# Altium PCB OK335xD V2.4 20160121.PcbDoc (part 4 of 4)
Units mm, origin at the board's own origin, x right, y up, seen from the top; angles counter-clockwise.
Board outline 190 x 130 mm, 4 copper layers (Top Layer, GND, POWER, Bottom Layer); 326 components, 332 nets, 1399 pads, 799 vias.
Unrouted connection lines stored in the file: 413.
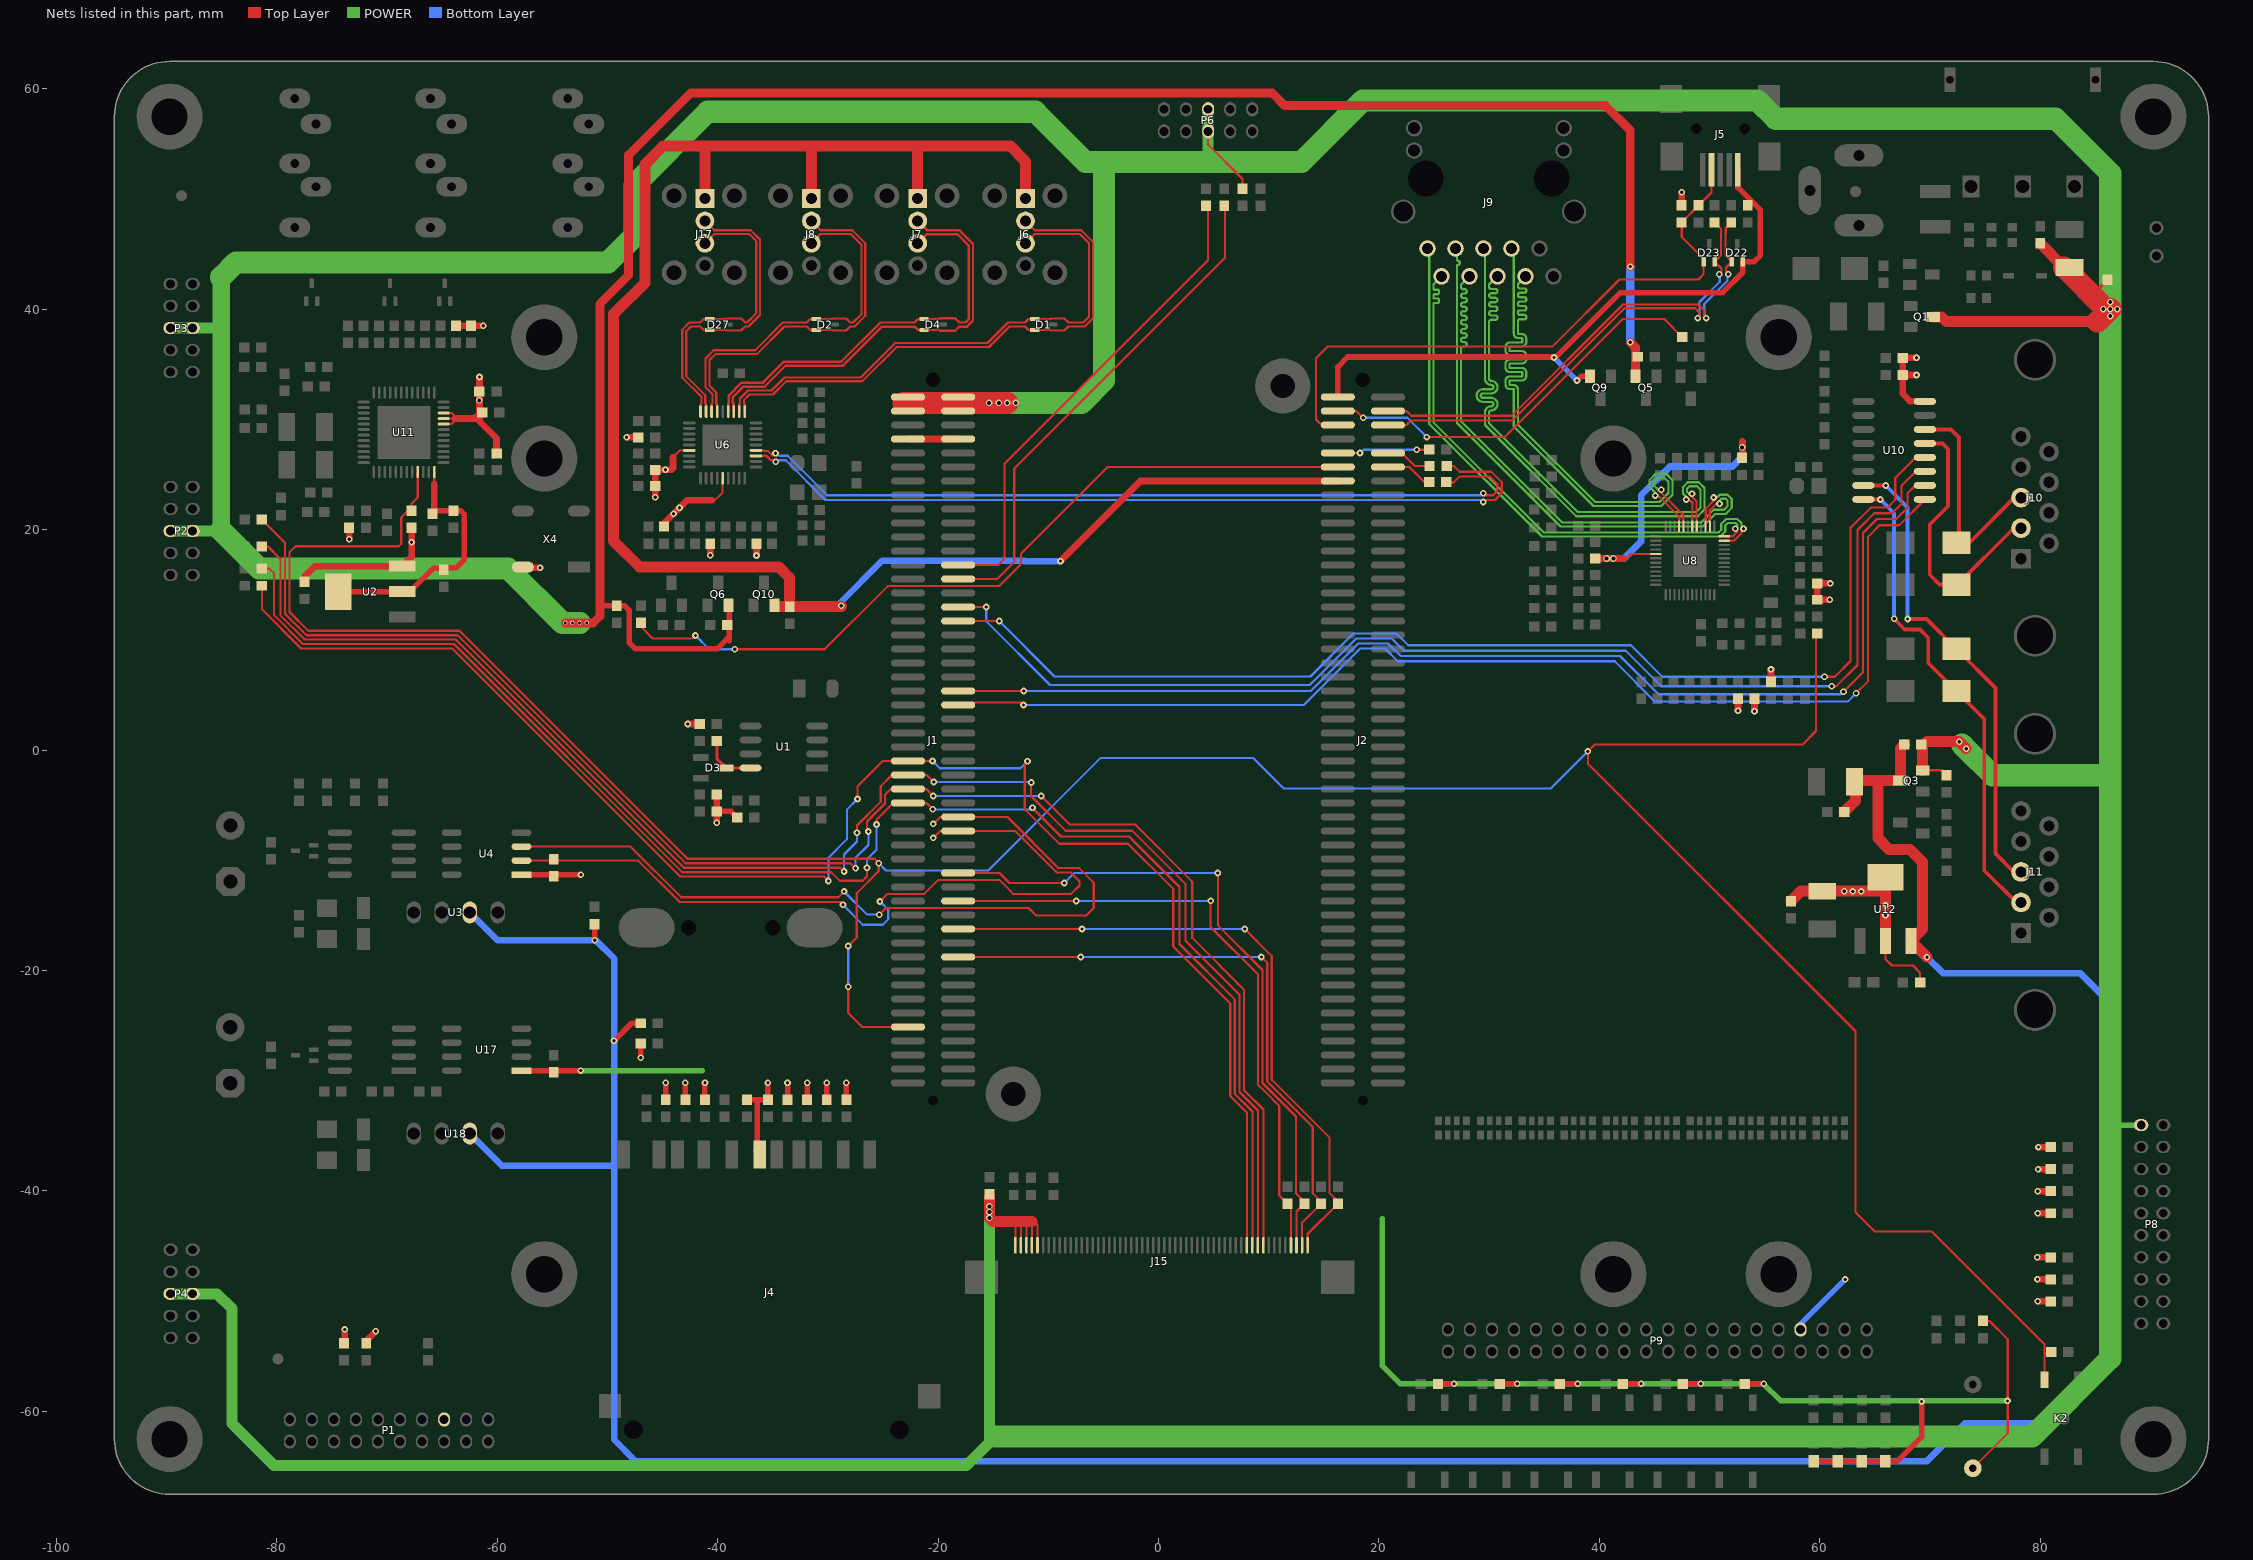
[diagram p6: the nets of this part, all layers, seen from the top]

## Via types
v1: diameter 0.6, hole 0.3, Top Layer to Bottom Layer, tented both sides, 718 vias
v2: diameter 0.66, hole 0.3, Top Layer to Bottom Layer, tented both sides, 34 vias
v3: diameter 0.6, hole 0.35, Top Layer to Bottom Layer, tented both sides, 25 vias
v4: diameter 0.45, hole 0.3, Top Layer to Bottom Layer, tented both sides, 16 vias
v5: diameter 0.4, hole 0.254, Top Layer to Bottom Layer, 4 vias
v6: diameter 0.6, hole 0.3, Top Layer to Bottom Layer, 2 vias

## Nets (pads, with @x,y where several pads share a name; then routed paths per layer and width w, separated by ;. In a path a pad name is that pad's centre, name@x,y a point inside that pad or via, vN(x,y) a via of type N, cw(c..) or ccw(c..) an arc to the next point about the centre after c; other vN are vias at no path point) (continued)
RSCREEN_XLEFT: C78.1 J1.78 J15.1 | length 59.3
  Top Layer w0.2: J1.78@-18.175,-16.235 v1(-6.939,-16.235) ; v1(7.819,-16.235) 10.287,-18.703 10.287,-29.921 15.531,-35.166 15.531,-40.21 16.281,-40.96 C78.1@16.281,-41.161 13.525,-43.917 J15.1@13.525,-44.925
  Bottom Layer w0.2: v1(-6.939,-16.235) v1(7.819,-16.235)
RSCREEN_XRIGHT: C83.1 J1.82 J15.2 | length 56.6
  Top Layer w0.2: J1.82@-18.175,-18.775 v1(-7.04,-18.775) ; v1(9.343,-18.775) 9.867,-19.299 9.867,-30.067 14.007,-34.207 14.007,-40.224 14.757,-40.974 C83.1@14.757,-41.161 13.025,-42.893 J15.2@13.025,-44.925
  Bottom Layer w0.2: v1(-7.04,-18.775) v1(9.343,-18.775)
RSCREEN_YDOWN: C85.1 J1.74 J15.4 | length 57.2
  Top Layer w0.2: J1.74@-18.175,-13.695 v1(-7.468,-13.695) ; v1(4.75,-13.691) 4.724,-13.716 4.724,-16.053 9.027,-20.355 9.027,-30.358 9.631,-30.963 9.631,-30.97 10.959,-32.298 10.959,-40.411 C85.1@11.709,-41.161 ; C85.1@11.735,-41.136 12.025,-41.426 J15.4@12.025,-44.925
  Bottom Layer w0.2: v1(-7.468,-13.695) 4.745,-13.695 v1(4.75,-13.691)
RSCREEN_YUP: C84.1 J1.70 J15.3 | length 61.6
  Top Layer w0.2: J1.70@-18.175,-11.155 -14.423,-11.155 -13.513,-12.065 v1(-8.56,-12.065) ; v1(5.389,-11.155) 5.389,-15.905 9.447,-19.963 9.447,-30.213 12.483,-33.249 12.483,-40.21 13.233,-40.96 C84.1@13.233,-41.161 12.525,-41.869 J15.3@12.525,-44.925
  Bottom Layer w0.2: v1(-8.56,-12.065) -7.65,-11.155 v1(5.389,-11.155)
RXD0: D10.2 J10.2 U10.13 | length 25.2
  Top Layer w0.35: U10.13@69.544,27.82 71.139,27.82 71.628,27.33 71.628,22.123 69.977,20.472 69.977,15.9 70.866,15.011 D10.2@72.39,15.011 72.492,15.011 77.608,20.128 J10.2@78.26,20.128
RXD1: D12.2 J11.2 U10.8 | length 44.4
  Top Layer w0.35: U10.8@63.956,22.74 63.963,22.733 v1(65.507,22.733) ; v1(66.751,11.913) 67.716,10.947 69.088,10.947 69.85,10.185 69.85,7.899 D12.2@72.39,5.359 74.93,2.819 74.93,-10.922 77.836,-13.828 J11.2@78.26,-13.828
  Bottom Layer w0.35: v1(65.507,22.733) 66.751,21.488 v1(66.751,11.913)
SPI1_CS0: J1.59 J15.11 R49.2 | length 141.2
  Top Layer w0.2: R49.2@-81.343,16.459 -80.67,16.459 -80.239,16.027 -80.239,12.224 -77.635,9.62 -63.919,9.62 -43.218,-11.081 -29.686,-11.081 -28.905,-11.862 -26.822,-11.862 -26.441,-11.481 v1(-26.441,-10.693) ; v1(-25.578,-6.756) -25.578,-6.325 -24.055,-4.802 -22.725,-4.802 -21.056,-4.802 v1(-20.472,-5.385) ; v1(-11.43,-5.232) -11.43,-5.258 -8.839,-7.849 -2.667,-7.849 1.905,-12.421 1.905,-17.602 6.927,-22.624 6.927,-31.207 8.525,-32.805 J15.11@8.525,-44.925
  Bottom Layer w0.2: v1(-26.441,-10.693) -26.441,-9.906 -25.578,-9.042 v1(-25.578,-6.756) ; v1(-20.472,-5.385) -11.582,-5.385 v1(-11.43,-5.232)
SPI1_MISO: J1.57 J15.9 R84.1 | length 145.9
  Top Layer w0.2: R84.1@-81.369,20.93 -81.369,20.917 -79.252,18.8 -79.252,12.369 -77.303,10.42 -63.587,10.42 -42.899,-10.268 -27.934,-10.268 v1(-27.483,-10.719) ; v1(-26.314,-7.391) -26.441,-7.264 -26.441,-6.491 -24.803,-4.853 -24.803,-4.051 -24.283,-3.532 -22.725,-3.532 -21.056,-3.532 v1(-20.422,-4.166) ; v1(-10.643,-4.166) -8.052,-6.756 -2.108,-6.756 3.073,-11.938 3.073,-17.043 7.767,-21.737 7.767,-30.86 9.525,-32.617 J15.9@9.525,-44.925
  Bottom Layer w0.2: v1(-27.483,-10.719) -27.483,-9.779 -26.314,-8.611 v1(-26.314,-7.391) ; v1(-20.422,-4.166) v1(-10.643,-4.166)
SPI1_MOSI: J1.55 J15.10 R79.1 | length 145.5
  Top Layer w0.2: R79.1@-81.343,18.466 -80.797,18.466 -79.672,17.34 -79.672,12.223 -77.469,10.02 -63.753,10.02 -43.052,-10.681 -28.867,-10.681 v1(-28.524,-11.024) ; v1(-27.356,-7.493) -27.356,-6.839 -25.203,-4.687 -25.203,-3.283 -24.182,-2.262 -22.725,-2.262 -21.03,-2.262 v1(-20.396,-2.896) ; v1@-11.557,-2.946 -11.557,-4.166 -8.407,-7.315 -2.388,-7.315 2.464,-12.167 2.464,-17.323 7.347,-22.206 7.347,-31.033 9.025,-32.711 J15.10@9.025,-44.925
  Bottom Layer w0.2: v1(-28.524,-11.024) -28.524,-9.474 -27.356,-8.306 v1(-27.356,-7.493) ; v1(-20.396,-2.896) v1@-11.532,-2.896
  other v1: -11.532,-2.946
SPI1_SCLK: J1.53 J15.12 R28.2 | length 146.4
  Top Layer w0.2: R28.2@-81.343,14.91 -81.343,12.763 -77.8,9.22 -64.084,9.22 -43.383,-11.481 -30.353,-11.481 v1(-29.947,-11.887) ; v1(-27.305,-4.445) -27.305,-3.277 -25.02,-0.992 -22.725,-0.992 v1(-20.499,-0.992) ; v1(-11.887,-1.016) -12.135,-1.264 -12.135,-5.376 -9.015,-8.496 -2.756,-8.496 1.346,-12.598 1.346,-17.831 6.507,-22.992 6.507,-31.381 8.025,-32.899 J15.12@8.025,-44.925
  Bottom Layer w0.2: v1(-29.947,-11.887) -29.947,-9.779 -28.27,-8.103 -28.27,-5.41 v1(-27.305,-4.445) ; v1(-20.499,-0.992) -19.84,-1.651 -12.522,-1.651 v1(-11.887,-1.016)
SYS_WARMRESET: C80.2 J1.91 K2.2 R7.2 R96.1 U11.33 | length 285.7
  Top Layer w0.2: U11.33@-67.203,25.229 -67.203,22.916 -67.767,22.352 R96.1@-67.767,21.705 -68.11,21.705 -68.707,21.107 -68.707,18.72 -68.936,18.491 -78.283,18.491 -78.842,17.932 -78.842,12.524 -77.137,10.82 -63.421,10.82 -42.734,-9.868 -25.769,-9.868 v1(-25.375,-10.262) -25.375,-10.98 -27.381,-12.986 -27.381,-17.018 v1(-28.143,-17.78) ; v1(-28.143,-21.488) -28.143,-23.851 -26.872,-25.122 J1.91@-22.725,-25.122 ; R7.2@59.665,10.477 59.665,1.727 58.445,0.508 39.599,0.508 v1(38.964,-0.127) 38.964,-1.219 63.246,-25.502 63.246,-41.935 64.999,-43.688 70.155,-43.688 80.391,-53.924 80.391,-54.762 ; K2.2@80.391,-56.845 80.391,-54.762 ; C80.2@80.837,-54.762 80.391,-54.762
  Bottom Layer w0.2: v1(-28.143,-21.488) v1(-28.143,-17.78) ; v1(-25.375,-10.262) -24.714,-10.922 -15.443,-10.922 -5.232,-0.711 8.585,-0.711 11.354,-3.48 35.611,-3.48 v1(38.964,-0.127)
TXD0: D11.2 J10.3 U10.14 | length 20.5
  Top Layer w0.35: U10.14@69.544,29.09 71.901,29.09 72.644,28.346 D11.2@72.644,18.821 ; D11.2@72.39,18.821 D11.2@72.644,18.821 ; J10.3@78.26,22.897 77.684,22.897 73.609,18.821 D11.2@72.644,18.821
TXD1: D13.2 J11.3 U10.7 | length 43.6
  Top Layer w0.35: U10.7@63.956,24.01 63.963,24.003 v1(65.989,24.003) ; v1(67.97,11.887) 69.698,11.887 D13.2@72.39,9.195 75.946,5.639 75.946,-9.398 77.608,-11.06 J11.3@78.26,-11.06
  Bottom Layer w0.35: v1(65.989,24.003) 67.97,22.022 v1(67.97,11.887)
TXRXA_N: J9.10 U8.12 | length 51.3
  Top Layer w0.2: U8.12@51.336,19.396 51.967,19.396 51.982,19.381 52.095,19.381 52.527,19.813 52.527,20.015 52.476,20.066 v1@52.352,20.066
  POWER w0.2: J9.10@24.41,45.507 24.573,45.344 24.573,29.59 34.797,19.366 50.964,19.366 51.435,19.837 51.435,20.371 51.664,20.599 52.375,20.599 52.527,20.447 52.527,20.241 v1@52.352,20.066
  other v1: 52.324,20.066
TXRXA_P: J9.9 U8.11 | length 51.2
  Top Layer w0.2: U8.11@51.336,18.996 51.967,18.996 51.982,19.011 52.249,19.011 52.897,19.659 52.897,20.015 52.948,20.066 v1@53.072,20.066
  POWER w0.2: J9.9@25.68,42.977 24.943,42.24 24.943,41.961 24.943,41.881 ccw(c25.063,41.881) 25.063,41.761 25.331,41.761 cw(c25.331,41.641) 25.451,41.641 25.451,41.481 cw(c25.331,41.481) 25.331,41.361 25.063,41.361 ccw(c25.063,41.241) 24.943,41.241 24.943,41.081 ccw(c25.063,41.081) 25.063,40.961 25.331,40.961 cw(c25.331,40.841) 25.451,40.841 25.451,40.681 cw(c25.331,40.681) 25.331,40.561 25.063,40.561 ccw(c25.063,40.441) 24.943,40.441 24.943,40.161 24.943,39.98 24.943,29.743 34.95,19.736 50.811,19.736 51.065,19.99 51.065,20.524 51.173,20.632 51.51,20.969 52.528,20.969 52.897,20.6 52.897,20.241 v1@53.072,20.066
  other v1: 53.086,20.066
TXRXB_N: J9.8 U8.15 | length 51.4
  Top Layer w0.2: U8.15@49.635,20.297 49.635,20.929 49.65,20.944 49.65,21.903 50.437,22.69 50.437,22.766 v1@50.351,22.852
  POWER w0.2: J9.8@26.95,45.507 27.087,45.37 27.087,44.602 27.087,44.456 ccw(c27.141,44.456) 27.141,44.402 cw(c27.141,44.202) 27.341,44.202 cw(c27.141,44.202) 27.141,44.002 ccw(c27.141,43.948) 27.087,43.948 27.087,43.79 27.087,29.666 36.474,20.28 49.389,20.28 49.465,20.356 50.532,21.423 51.461,21.423 52.008,21.97 52.008,22.785 51.735,23.058 51.626,23.167 50.913,23.167 50.805,23.058 50.599,22.852 v1@50.351,22.852
  other v1: 50.368,22.911
TXRXB_P: J9.7 U8.14 | length 51.3
  Top Layer w0.2: U8.14@50.035,20.297 50.035,20.929 50.02,20.944 50.02,21.749 50.698,22.428 50.775,22.428 v1@50.86,22.343
  POWER w0.2: J9.7@28.22,42.977 27.457,42.214 27.457,42.012 27.457,41.992 ccw(c27.637,41.992) 27.637,41.812 27.785,41.812 cw(c27.785,41.632) 27.965,41.632 27.965,41.592 cw(c27.785,41.592) 27.785,41.412 27.637,41.412 ccw(c27.637,41.232) 27.457,41.232 27.457,41.192 ccw(c27.637,41.192) 27.637,41.012 27.785,41.012 cw(c27.785,40.832) 27.965,40.832 27.965,40.792 cw(c27.785,40.792) 27.785,40.612 27.637,40.612 ccw(c27.637,40.432) 27.457,40.432 27.457,40.392 ccw(c27.637,40.392) 27.637,40.212 27.785,40.212 cw(c27.785,40.032) 27.965,40.032 27.965,39.992 cw(c27.785,39.992) 27.785,39.812 27.637,39.812 ccw(c27.637,39.632) 27.457,39.632 27.457,39.592 ccw(c27.637,39.592) 27.637,39.412 27.785,39.412 cw(c27.785,39.232) 27.965,39.232 27.965,39.192 cw(c27.785,39.192) 27.785,39.012 27.637,39.012 ccw(c27.637,38.832) 27.457,38.832 27.457,38.792 ccw(c27.637,38.792) 27.637,38.612 27.785,38.612 cw(c27.785,38.432) 27.965,38.432 27.965,38.392 cw(c27.785,38.392) 27.785,38.212 27.637,38.212 ccw(c27.637,38.032) 27.457,38.032 27.457,37.992 ccw(c27.637,37.992) 27.637,37.812 27.785,37.812 cw(c27.785,37.632) 27.965,37.632 27.965,37.592 cw(c27.785,37.592) 27.785,37.412 27.637,37.412 ccw(c27.637,37.232) 27.457,37.232 27.457,37.192 ccw(c27.637,37.192) 27.637,37.012 27.785,37.012 cw(c27.785,36.832) 27.965,36.832 27.965,36.792 cw(c27.785,36.792) 27.785,36.612 27.637,36.612 ccw(c27.637,36.432) 27.457,36.432 27.457,36.212 27.457,35.865 27.457,29.82 36.627,20.65 49.235,20.65 50.378,21.793 51.308,21.793 51.638,22.123 51.638,22.631 51.473,22.797 51.067,22.797 50.86,22.59 v1@50.86,22.343
  other v1: 50.902,22.352
TXRXC_N: J9.6 U8.18 | length 51.3
  Top Layer w0.2: v1@47.87,22.749 48.117,22.749 48.45,22.416 48.45,20.944 48.435,20.929 U8.18@48.435,20.297
  POWER w0.2: J9.6@29.49,45.507 29.627,45.37 29.627,38.583 29.627,33.692 ccw(c30.189,33.692) 30.189,33.13 cw(c30.189,32.93) 30.389,32.93 cw(c30.189,32.93) 30.189,32.73 29.435,32.73 ccw(c29.435,32.16) 28.865,32.16 ccw(c29.435,32.16) 29.435,31.59 30.189,31.59 cw(c30.189,31.39) 30.389,31.39 cw(c30.189,31.39) 30.189,31.19 ccw(c30.189,30.628) 29.627,30.628 29.627,29.489 37.896,21.22 48.937,21.22 49.544,21.828 49.544,23.775 49.023,24.297 48.031,24.297 47.701,23.967 47.593,23.859 47.593,23.273 47.701,23.165 47.87,22.996 v1@47.87,22.749
  other v1: 47.879,22.733
TXRXC_P: J9.5 U8.17 | length 51.3
  Top Layer w0.2: v1@48.379,23.258 48.379,23.011 48.82,22.57 48.82,20.944 48.835,20.929 U8.17@48.835,20.297
  POWER w0.2: J9.5@30.76,42.977 30.734,42.977 29.997,42.24 29.997,42.037 ccw(c30.197,42.037) 30.197,41.837 30.559,41.837 cw(c30.559,41.637) 30.759,41.637 cw(c30.559,41.637) 30.559,41.437 30.197,41.437 ccw(c30.197,41.237) 29.997,41.237 ccw(c30.197,41.237) 30.197,41.037 30.559,41.037 cw(c30.559,40.837) 30.759,40.837 cw(c30.559,40.837) 30.559,40.637 30.197,40.637 ccw(c30.197,40.437) 29.997,40.437 ccw(c30.197,40.437) 30.197,40.237 30.559,40.237 cw(c30.559,40.037) 30.759,40.037 cw(c30.559,40.037) 30.559,39.837 30.197,39.837 ccw(c30.197,39.637) 29.997,39.637 ccw(c30.197,39.637) 30.197,39.437 30.559,39.437 cw(c30.559,39.237) 30.759,39.237 cw(c30.559,39.237) 30.559,39.037 30.197,39.037 ccw(c30.197,38.837) 29.997,38.837 29.997,38.637 29.997,38.583 29.997,33.692 ccw(c30.189,33.692) 30.189,33.5 cw(c30.189,32.93) 30.759,32.93 cw(c30.189,32.93) 30.189,32.36 29.435,32.36 ccw(c29.435,32.16) 29.235,32.16 ccw(c29.435,32.16) 29.435,31.96 30.189,31.96 cw(c30.189,31.39) 30.759,31.39 cw(c30.189,31.39) 30.189,30.82 ccw(c30.189,30.628) 29.997,30.628 29.997,29.642 38.049,21.59 48.783,21.59 49.174,21.981 49.174,23.622 48.87,23.927 48.184,23.927 47.963,23.706 47.963,23.426 48.131,23.258 v1@48.379,23.258
  other v1: 48.412,23.266
TXRXD_N: J9.4 U8.21 | length 51.3
  Top Layer w0.2: v1@45.101,23.079 45.187,23.165 45.263,23.165 47.25,21.178 47.25,20.944 47.235,20.929 U8.21@47.235,20.297
  POWER w0.2: J9.4@32.03,45.507 32.244,45.293 32.244,38.557 32.244,37.794 ccw(c32.66,37.794) 32.66,37.378 32.96,37.378 cw(c32.96,37.332) 33.006,37.332 33.006,37.024 cw(c32.96,37.024) 32.96,36.978 31.898,36.978 ccw(c31.898,36.562) 31.482,36.562 31.482,36.254 ccw(c31.898,36.254) 31.898,35.838 32.96,35.838 cw(c32.96,35.792) 33.006,35.792 33.006,35.484 cw(c32.96,35.484) 32.96,35.438 31.898,35.438 ccw(c31.898,35.022) 31.482,35.022 31.482,34.714 ccw(c31.898,34.714) 31.898,34.298 32.96,34.298 cw(c32.96,34.252) 33.006,34.252 33.006,33.944 cw(c32.96,33.944) 32.96,33.898 31.898,33.898 ccw(c31.898,33.482) 31.482,33.482 31.482,33.174 ccw(c31.898,33.174) 31.898,32.758 32.198,32.758 cw(c32.198,32.712) 32.244,32.712 32.244,29.362 39.471,22.134 45.619,22.134 46.649,23.164 46.649,24.486 46.051,25.084 45.135,25.084 44.563,24.512 44.563,23.865 45.101,23.327 v1@45.101,23.079
  other v1: 45.085,23.089
TXRXD_P: J9.3 U8.20 | length 51.3
  Top Layer w0.2: v1@45.61,23.588 45.524,23.503 45.524,23.426 47.62,21.331 47.62,20.944 47.635,20.929 U8.20@47.635,20.297
  POWER w0.2: J9.3@33.3,42.977 32.614,42.291 32.614,42.088 32.614,42.068 ccw(c32.794,42.068) 32.794,41.888 33.196,41.888 cw(c33.196,41.708) 33.376,41.708 33.376,41.668 cw(c33.196,41.668) 33.196,41.488 32.794,41.488 ccw(c32.794,41.308) 32.614,41.308 32.614,41.268 ccw(c32.794,41.268) 32.794,41.088 33.196,41.088 cw(c33.196,40.908) 33.376,40.908 33.376,40.868 cw(c33.196,40.868) 33.196,40.688 32.794,40.688 ccw(c32.794,40.508) 32.614,40.508 32.614,40.468 ccw(c32.794,40.468) 32.794,40.288 33.196,40.288 cw(c33.196,40.108) 33.376,40.108 33.376,40.068 cw(c33.196,40.068) 33.196,39.888 32.794,39.888 ccw(c32.794,39.708) 32.614,39.708 32.614,39.668 ccw(c32.794,39.668) 32.794,39.488 33.196,39.488 cw(c33.196,39.308) 33.376,39.308 33.376,39.268 cw(c33.196,39.268) 33.196,39.088 32.794,39.088 ccw(c32.794,38.908) 32.614,38.908 32.614,38.688 32.614,38.557 32.614,37.794 ccw(c32.66,37.794) 32.66,37.748 32.96,37.748 cw(c32.96,37.332) 33.376,37.332 33.376,37.024 cw(c32.96,37.024) 32.96,36.608 31.898,36.608 ccw(c31.898,36.562) 31.852,36.562 31.852,36.254 ccw(c31.898,36.254) 31.898,36.208 32.96,36.208 cw(c32.96,35.792) 33.376,35.792 33.376,35.484 cw(c32.96,35.484) 32.96,35.068 31.898,35.068 ccw(c31.898,35.022) 31.852,35.022 31.852,34.714 ccw(c31.898,34.714) 31.898,34.668 32.96,34.668 cw(c32.96,34.252) 33.376,34.252 33.376,33.944 cw(c32.96,33.944) 32.96,33.528 31.898,33.528 ccw(c31.898,33.482) 31.852,33.482 31.852,33.174 ccw(c31.898,33.174) 31.898,33.128 32.198,33.128 cw(c32.198,32.712) 32.614,32.712 32.614,29.515 39.624,22.504 45.466,22.504 46.279,23.317 46.279,24.333 45.898,24.714 45.288,24.714 44.933,24.359 44.933,24.018 45.363,23.588 v1@45.61,23.588
  other v1: 45.618,23.622
UART0_RXD: J1.34 U10.12 | length 109.5
  Top Layer w0.2: J1.34@-18.175,11.705 v1(-14.448,11.705) ; v3(60.427,6.655) 61.366,6.655 62.789,8.077 62.789,20.168 64.618,21.996 66.142,21.996 66.853,22.708 66.853,24.689 68.714,26.55 U10.12@69.544,26.55
  Bottom Layer w0.2: v1(-14.448,11.705) -9.423,6.68 13.792,6.68 17.682,10.57 21.586,10.57 22.657,9.5 42.875,9.5 45.72,6.655 v3(60.427,6.655)
UART0_TXD: J1.32 U10.11 | length 111.1
  Top Layer w0.2: J1.32@-18.175,12.975 v1(-15.621,12.975) ; v3(61.087,5.791) 61.493,5.791 63.424,7.722 63.424,19.964 64.948,21.488 66.548,21.488 67.412,22.352 67.412,23.978 68.714,25.28 U10.11@69.544,25.28
  Bottom Layer w0.2: v1(-15.621,12.975) -15.621,11.684 -9.837,5.9 13.72,5.9 17.941,10.12 21.173,10.12 22.276,9.017 42.393,9.017 45.618,5.791 v3(61.087,5.791)
UART1_RXD: J1.46 U10.9 | length 107.3
  Top Layer w0.2: J1.46@-18.175,4.085 -17.175,4.085 -16.942,4.318 -12.48,4.318 v1(-12.247,4.085) ; v3(63.297,5.156) 64.389,6.248 64.389,19.355 65.43,20.396 67.201,20.396 U10.9@69.544,22.74
  Bottom Layer w0.2: v1(-12.247,4.085) 13.178,4.085 18.313,9.22 20.549,9.22 21.717,8.052 41.402,8.052 45.06,4.394 62.535,4.394 v3(63.297,5.156)
UART1_TXD: J1.44 U10.10 | length 107.4
  Top Layer w0.2: J1.44@-18.175,5.355 v1(-12.213,5.355) ; v3(62.154,5.283) 63.932,7.061 63.932,19.685 65.202,20.955 66.954,20.955 67.97,21.971 67.97,23.292 68.688,24.01 U10.10@69.544,24.01
  Bottom Layer w0.2: v1(-12.213,5.355) 13.812,5.355 18.127,9.67 20.835,9.67 21.971,8.534 41.885,8.534 45.364,5.055 61.925,5.055 v3(62.154,5.283)
UART2_RX: J1.64 R150.2 U4.2 | length 73.4
  Top Layer w0.2: U4.2@-57.798,-10.033 -47.193,-10.033 -43.434,-13.792 -28.88,-13.792 v1(-28.626,-14.046) ; v1(-25.273,-13.741) -24.582,-13.05 -21.241,-13.05 -20.875,-12.684 -20.875,-12.681 -19.974,-11.78 -14.458,-11.78 -13.188,-13.05 -7.919,-13.05 -7.163,-12.294 -7.163,-11.913 -7.963,-11.112 -9.227,-11.112 -12.994,-7.345 J1.64@-18.175,-7.345 -19.791,-7.345 v1(-20.422,-7.976)
  Bottom Layer w0.2: v1(-28.626,-14.046) -26.822,-15.85 -25.019,-15.85 -24.511,-15.342 -24.511,-14.503 v1(-25.273,-13.741)
UART2_TX: J1.62 U4.3 | length 75.3
  Top Layer w0.2: U4.3@-57.798,-8.763 -47.898,-8.763 -43.3,-13.36 -29.058,-13.36 v1(-28.524,-12.827) ; v1(-25.324,-14.935) -24.714,-14.326 -11.786,-14.326 -11.1,-15.011 -6.553,-15.011 -5.867,-14.326 -5.867,-12.04 -7.195,-10.712 -9.061,-10.712 -13.699,-6.075 J1.62@-18.175,-6.075 -19.791,-6.075 v1(-20.422,-6.706)
  Bottom Layer w0.2: v1(-28.524,-12.827) -26.416,-14.935 v1(-25.324,-14.935)
UART4_RX: J1.26 R148.2 | length 44.1
  Top Layer w0.2: J1.26@-18.175,16.785 -14.533,16.785 -13.97,17.348 -13.97,25.984 4.496,44.45 R148.2@4.496,49.39
UART4_TX: J1.28 R147.1 | length 46
  Top Layer w0.2: J1.28@-18.175,15.515 -14.635,15.515 -13.081,17.069 -13.081,25.552 6.045,44.679 R147.1@6.045,49.39
USB0_DRVVBUS: J2.3 R109.2 | length 37.4
  Top Layer w0.2: J2.3@16.275,30.758 17.959,30.758 v1(18.567,30.15) ; v1(24.333,28.397) 31.42,28.397 42.139,39.116 45.885,39.116 R109.2@47.536,37.465
  Bottom Layer w0.2: v1(18.567,30.15) 22.581,30.15 v1(24.333,28.397)
USB0_ID: D23.1 J2.5 J5.4 R13.2 R45.2 | length 57.5
  Top Layer w0.2: J2.5@16.275,29.488 14.809,29.488 14.3,29.997 14.3,35.56 15.342,36.601 35.738,36.601 41.834,42.697 48.997,42.697 49.462,43.163 D23.1@49.462,44.311 49.462,44.569 47.473,46.558 R13.2@47.473,47.866 47.473,47.892 R45.2@48.997,49.416 50.175,50.594 J5.4@50.175,52.655
USB0_N: D22.1 J2.4 R48.1 | length 44.3
  Top Layer w0.2: J2.4@20.825,30.755 22.503,30.755 22.928,30.33 32.045,30.33 42.146,40.431 48.961,40.431 49.518,39.874 49.518,39.342 v1@49.668,39.192 ; v1@51.649,43.18 51.499,43.33 51.499,43.783 D22.1@52.027,44.311 51.455,44.883 51.455,46.863 51.473,46.881 51.473,47.371 R48.1@51.968,47.866
  Bottom Layer w0.2: v1@49.668,39.192 49.518,39.342 49.518,40.476 51.622,42.58 v1@51.622,43.153
  other v1: 49.708,39.192 51.689,43.18
USB0_P: D23.2 J2.6 R41.1 | length 43.7
  Top Layer w0.2: J2.6@20.825,29.485 22.503,29.485 22.928,29.91 32.12,29.91 42.291,40.081 48.717,40.081 49.098,39.7 49.098,39.342 v1@48.948,39.192 ; R41.1@50.47,47.866 51.053,47.283 51.053,47.055 51.035,47.037 51.035,44.884 D23.2@50.462,44.311 51.079,43.693 51.079,43.33 v1@50.929,43.18
  Bottom Layer w0.2: v1@48.948,39.192 49.098,39.342 49.098,40.65 50.929,42.481 v1@50.929,43.18
  other v1: 48.92,39.192 50.876,43.18
USB0_VBUS: C15.1 D22.2 J2.1 J5.1 Q9.2 | length 58.7
  Top Layer w0.5: J2.1@16.275,32.028 16.275,34.766 17.17,35.662 v1@35.89,35.662 ; v1(35.89,35.611) v1@36.017,35.611 ; v1@36.017,35.662 36.068,35.662 41.885,41.478 51.156,41.478 ; v1(37.973,33.528) 38.354,33.909 Q9.2@39.154,33.909 ; 51.185,41.508 53.027,43.35 D22.2@53.027,44.311 54.039,44.311 54.61,44.882 54.61,48.997 52.575,51.032 J5.1@52.575,52.65
  Bottom Layer w0.5: v1(35.89,35.611) v1(37.973,33.528)
USB1_DRVVBUS: J2.11 R110.2 | length 72.2
  Top Layer w0.2: R110.2@-47.295,11.544 -45.86,10.109 -42.291,10.109 v1(-42.012,10.389) ; v1(-38.456,9.144) -30.302,9.144 -24.573,14.873 -14.464,14.873 -12.471,16.866 -12.471,17.805 -4.598,25.678 J2.11@16.275,25.678
  Bottom Layer w0.2: v1(-42.012,10.389) -40.767,9.144 v1(-38.456,9.144)
USB1_ID: J2.9 R36.2 | length 8.4
  Top Layer w0.2: J2.9@16.275,26.948 16.276,26.949 v1(18.288,26.949) ; v1(23.444,27.254) R36.2@24.574,27.254
  Bottom Layer w0.2: v1(18.288,26.949) 18.593,27.254 v1(23.444,27.254)
USB1_N: J2.10 R40.2 | length 4.2
  Top Layer w0.2: J2.10@20.825,26.945 22.077,26.945 23.243,25.779 R40.2@24.591,25.779
USB1_P: J2.12 R38.2 | length 4.3
  Top Layer w0.2: J2.12@20.825,25.675 22.763,25.675 24.134,24.304 R38.2@24.574,24.304
USB1_VBUS: C16.1 J2.13 J6.1 J7.1 J8.1 J17.1 Q10.2 | length 164.7
  Top Layer w0.6: v1(-8.89,17.145) -1.627,24.408 J2.13@16.275,24.408
  Top Layer w1: J17.1@-41.148,50.038 -41.148,54.788 ; Q10.2@-34.722,13.018 C16.1@-33.464,13.018 ; J8.1@-31.496,50.038 -31.496,54.661 -31.623,54.788 ; v1@-28.778,13.018 C16.1@-33.452,13.018 C16.1@-33.464,13.018 ; J7.1@-21.844,50.038 -21.844,54.762 -21.869,54.788 ; J6.1@-12.065,50.038 -12.065,53.416 -13.437,54.788 -21.869,54.788 ; -41.148,54.788 -44.933,54.788 -46.584,53.137 -46.584,42.393 -49.428,39.548 -49.428,18.974 -47.066,16.612 -34.442,16.612 -33.464,15.633 C16.1@-33.464,13.018 ; -41.148,54.788 -31.623,54.788 ; -31.623,54.788 -21.869,54.788
  Bottom Layer w0.6: v1(-28.778,13.081) -28.778,13.462 -25.07,17.17 -12.192,17.17 -12.167,17.145 v1(-8.89,17.145)
USB_DC: J1.7 J1.8 | length 4.6
  Top Layer w0.6: J1.7@-22.725,28.218 -18.178,28.218 J1.8@-18.175,28.215
USBD1_N: D1.2 J6.2 U6.1 | length 50
  Top Layer w0.2: U6.1@-37.542,30.709 -37.542,31.393 -37.617,31.468 -37.617,31.75 -37.104,32.264 -34.97,32.264 -33.782,33.452 -26.873,33.452 -23.749,36.576 -15.367,36.576 -13.51,38.433 -12.112,38.433 -11.787,38.108 D1.2@-11.239,38.108 -9.796,38.108 -9.746,38.058 -8.535,38.058 -8.16,38.433 -6.69,38.433 -6.052,39.072 -5.949,39.174 -5.949,46.119 -6.052,46.221 -6.995,47.165 -11.224,47.165 J6.2@-12.065,48.006
USBD1_P: D1.1 J6.3 U6.2 | length 49.4
  Top Layer w0.2: U6.2@-38.042,30.709 -38.042,31.393 -37.967,31.468 -37.967,31.895 -37.249,32.614 -35.115,32.614 -33.927,33.802 -27.018,33.802 -23.894,36.926 -15.512,36.926 -13.655,38.783 -12.112,38.783 -11.787,39.108 D1.1@-11.239,39.108 -9.796,39.108 -9.746,39.158 -8.535,39.158 -8.16,38.783 -6.835,38.783 -6.299,39.319 -6.299,45.974 -7.14,46.815 -11.224,46.815 J6.3@-12.065,45.974
USBD2_N: D4.2 J7.2 U6.3 | length 39.1
  Top Layer w0.22: U6.3@-38.542,30.709 -38.542,31.419 -38.607,31.484 -38.607,32.029 -37.663,32.974 -35.718,32.974 -33.818,34.874 -28.626,34.874 -25.077,38.423 -22.135,38.423 -21.82,38.108 D4.2@-21.272,38.108 -19.843,38.108 -19.783,38.048 -18.437,38.048 -18.062,38.423 -17.366,38.423 -16.826,38.963 -16.826,45.899 -18.102,47.175 -21.013,47.175 J7.2@-21.844,48.006
USBD2_P: D4.1 J7.3 U6.4 | length 38.5
  Top Layer w0.22: U6.4@-39.042,30.709 -39.042,31.419 -38.977,31.484 -38.977,32.183 -37.816,33.344 -35.871,33.344 -33.971,35.244 -28.779,35.244 -25.23,38.793 -22.135,38.793 -21.82,39.108 D4.1@-21.272,39.108 -19.843,39.108 -19.783,39.168 -18.437,39.168 -18.062,38.793 -17.519,38.793 -17.196,39.116 -17.196,45.745 -18.255,46.805 -21.013,46.805 J7.3@-21.844,45.974
USBD3_N: D2.2 J8.2 U6.6 | length 33.4
  Top Layer w0.2: U6.6@-40.042,30.709 -40.042,31.393 -40.117,31.468 -40.117,32.434 -40.742,33.058 -40.742,35.382 -40.203,35.921 -36.443,35.921 -33.932,38.433 -31.924,38.433 -31.599,38.108 D2.2@-31.051,38.108 -29.608,38.108 -29.558,38.058 -28.347,38.058 -27.972,38.433 -27.566,38.433 -26.599,39.4 -26.599,45.992 -27.772,47.165 -30.655,47.165 J8.2@-31.496,48.006
USBD3_P: D2.1 J8.3 U6.7 | length 32.8
  Top Layer w0.2: U6.7@-40.542,30.709 -40.542,31.393 -40.467,31.468 -40.467,32.289 -41.092,32.913 -41.092,35.527 -40.348,36.271 -36.588,36.271 -34.077,38.783 -31.924,38.783 -31.599,39.108 D2.1@-31.051,39.108 -29.608,39.108 -29.558,39.158 -28.347,39.158 -27.972,38.783 -27.711,38.783 -26.949,39.545 -26.949,45.847 -27.917,46.815 -30.655,46.815 J8.3@-31.496,45.974
USBD4_N: D27.2 J17.2 U6.8 | length 28.2
  Top Layer w0.2: J17.2@-41.148,48.006 -40.307,47.165 -36.993,47.165 -36.15,46.322 -36.15,39.476 -37.193,38.433 -37.497,38.433 -37.872,38.058 -39.21,38.058 -39.26,38.108 D27.2@-40.703,38.108 -41.251,38.108 -41.576,38.433 -42.415,38.433 -42.85,37.998 -42.85,33.921 -41.117,32.189 -41.117,31.468 -41.042,31.393 U6.8@-41.042,30.709
USBD4_P: D27.1 J17.3 U6.9 | length 27.6
  Top Layer w0.2: U6.9@-41.542,30.709 -41.542,31.393 -41.467,31.468 -41.467,32.044 -43.2,33.776 -43.2,38.143 -42.56,38.783 -41.576,38.783 -41.251,39.108 D27.1@-40.703,39.108 -39.26,39.108 -39.21,39.158 -37.872,39.158 -37.497,38.783 -37.338,38.783 -36.5,39.621 -36.5,46.177 -37.138,46.815 -40.307,46.815 J17.3@-41.148,45.974
USBUP_N: R40.1 U6.30 | length 76.5
  Top Layer w0.2: U6.30@-36.517,26.684 -35.815,26.684 -35.775,26.724 -35.611,26.724 -35.201,26.314 -34.897,26.314 v1@-34.747,26.164 ; R40.1@26.141,25.779 26.796,25.779 27.323,25.252 30.206,25.252 31.154,24.304 31.154,23.321 30.527,22.694 29.591,22.694 29.464,22.567 v1@29.464,22.544
  Bottom Layer w0.2: v1@-34.747,26.164 -34.623,26.289 -33.817,26.289 -30.222,22.694 29.314,22.694 v1@29.464,22.544
  other v1: 29.464,22.504 -34.722,26.162
USBUP_P: R38.1 U6.31 | length 75.1
  Top Layer w0.2: U6.31@-36.517,27.184 -35.815,27.184 -35.775,27.144 -35.437,27.144 -35.027,26.734 -34.897,26.734 v1@-34.747,26.884 ; R38.1@26.124,24.304 26.796,24.304 27.324,24.832 30.032,24.832 30.734,24.13 30.734,23.495 30.353,23.114 29.591,23.114 29.464,23.241 v1@29.464,23.264
  Bottom Layer w0.2: v1@-34.747,26.884 -34.597,26.734 -34.341,26.734 -34.315,26.709 -33.643,26.709 -30.048,23.114 29.314,23.114 v1@29.464,23.264
  other v1: 29.464,23.292 -34.747,26.924
VDD1V8: C69.1 C70.1 C73.1 U2.2 U2.4 U11.36 | length 23.6
  Top Layer w0.2: -65.703,24.137 U11.36@-65.703,25.229
  Top Layer w0.5: U2.4@-74.428,14.378 U2.2@-68.628,14.378 -67.918,14.378 -65.806,16.49 C73.1@-64.851,16.49 ; C69.1@-65.733,21.705 C70.1@-63.957,21.705 -63.284,21.705 -62.967,21.387 -62.967,17.297 -63.746,16.518 C73.1@-64.851,16.518
  Top Layer w0.6: C69.1@-65.862,21.576 -65.733,21.705 C69.1@-65.652,21.786 ; C69.1@-65.703,21.576 -65.703,24.137
VDD3V3: C5.1 C9.1 C10.1 C11.1 C12.1 C24.1 C25.1 C26.1 C49.1 C50.1 C67.2 C68.1 C72.1 C79.2 J4.4 L8.2 L14.1 LED4.1 LED5.1 LED6.1 LED7.1 P1.5 P9.7 R4.1 R5.1 R8.2 R13.1 R14.2 R17.1 R18.1 R19.1 R20.1 R21.1 R22.1 R23.1 R24.1 R25.1 R26.1 R27.1 R31.1 R32.1 R37.2 R52.2 R72.1 R80.2 R81.2 R86.2 R96.2 R97.2 R98.2 R99.2 R119.2 R124.1 R125.1 R126.1 R127.1 R128.1 R129.1 R130.1 R131.1 R132.1 R133.1 R149.1 R150.1 S2.1 U2.1 U4.1 U6.15 U6.23 U10.16 U11.44 U11.45 U11.46 U12.2 U12.4 U17.1 X4.4 | length 264.1
  Top Layer w0.2: U11.44@-64.853,29.579 -64.147,29.579 -63.83,29.896 -63.83,30.079 ; U11.45@-64.853,30.079 -63.83,30.079 ; U11.46@-64.853,30.579 -64.132,30.579 -63.83,30.277 -63.83,30.079 ; -44.044,26.568 -43.428,27.184 U6.15@-42.567,27.184 ; -40.31,22.606 -39.542,23.373 U6.23@-39.542,24.659 ; U12.2@65.965,-17.326 65.965,-18.975 66.548,-19.558 68.453,-19.558 69.101,-20.206 R14.2@69.101,-21.082 ; S2.1@73.889,-65.166 77.064,-61.991 77.064,-53.467 75.4,-51.803 R119.2@74.828,-51.803
  Top Layer w0.5: U17.1@-57.798,-29.083 v1(-52.426,-29.083) ; U4.1@-57.798,-11.303 v1(-52.4,-11.303) ; v1(-46.978,-27.927) C67.2@-46.978,-26.645 ; R26.1@-44.704,-31.724 v1(-44.704,-30.175) ; R25.1@-42.926,-31.724 v1(-42.926,-30.175) ; R24.1@-41.148,-31.724 v1(-41.148,-30.175) ; C72.1@-40.068,-5.563 -38.773,-5.563 R4.1@-38.215,-6.121 ; R23.1@-37.592,-31.724 C12.1@-35.433,-31.724 v1(-35.433,-30.175) ; J4.4@-36.525,-36.346 J4.4@-36.168,-36.703 ; J4.4@-36.398,-36.449 -36.398,-31.828 ; R27.1@-33.655,-31.724 v1(-33.655,-30.175) ; R22.1@-31.877,-31.724 v1(-31.877,-30.175) ; R21.1@-30.099,-31.724 v1(-30.099,-30.175) ; R20.1@-28.321,-31.724 v1(-28.321,-30.175) ; R126.1@25.362,-57.506 v1(26.822,-57.506) ; R125.1@30.95,-57.506 v1(32.563,-57.506) ; R124.1@36.411,-57.506 v1(38.049,-57.506) ; R32.1@42.126,-57.506 v1(43.79,-57.506) ; R31.1@47.587,-57.506 v1(49.2,-57.506) ; R17.1@53.175,-57.506 v1(54.915,-57.506) ; LED4.1@59.436,-64.528 LED5.1@61.646,-64.528 LED7.1@65.964,-64.528 67.044,-64.528 69.24,-62.332 v1(69.24,-59.106)
  Top Layer w0.6: C11.1@-77.47,15.253 -77.47,15.748 -76.54,16.678 U2.1@-68.628,16.678 -67.767,17.539 v1(-67.767,18.847) R96.2@-67.767,20.155 ; R19.1@-73.829,-53.711 v1(-73.829,-52.569) ; v1(-73.431,19.126) L8.2@-73.431,20.155 ; R18.1@-71.984,-53.708 v1(-71.006,-52.73) ; -63.83,30.079 -62.007,30.079 C5.1@-61.608,30.478 ; R99.2@-63.754,38.494 R98.2@-62.357,38.494 v1(-61.277,38.494) ; v1(-61.608,33.845) C68.1@-61.608,32.512 C5.1@-61.608,30.478 ; C5.1@-61.479,30.607 C5.1@-61.608,30.478 ; R97.2@-60.058,26.924 -60.058,28.283 -61.608,29.833 C5.1@-61.608,30.478 ; X4.4@-57.708,16.535 v1(-56.109,16.535) ; v1(-48.26,28.372) L14.1@-47.206,28.372 ; v1(-45.656,22.923) C26.1@-45.656,23.952 C24.1@-45.656,25.425 v1(-44.729,25.425) -44.171,25.425 -44.044,25.552 -44.044,26.568 ; C25.1@-44.856,20.282 -44.856,20.574 v1(-43.993,21.438) v1(-43.459,21.971) -42.774,22.657 -40.513,22.657 ; v1(-42.697,2.362) R5.1@-41.618,2.362 ; v1(-40.665,17.678) R52.2@-40.665,18.732 ; v1(-40.068,-6.602) C72.1@-40.068,-5.563 R8.2@-40.068,-4.039 ; v1(-36.474,17.653) R37.2@-36.474,18.732 ; R13.1@47.473,49.416 v1(47.473,50.597) ; v1(52.58,3.558) R80.2@52.58,4.642 ; v1(54.077,3.531) C79.2@54.077,4.661 ; R72.1@55.574,6.192 v1(55.574,7.314) ; v1(60.915,13.634) R81.2@59.76,13.634 R86.2@59.76,15.116 v1(60.957,15.116) ; C49.1@67.531,34.03 v1(68.777,34.03) ; v1(68.783,35.585) C50.1@67.526,35.585 67.526,32.321 68.218,31.63 U10.16@69.544,31.63 ; v1(79.731,-46.025) R132.1@80.939,-46.025 ; v1(79.75,-48.025) R133.1@80.939,-48.025 ; v1(79.768,-42.025) R131.1@80.939,-42.025 ; v1(79.776,-40.025) R130.1@80.939,-40.025 ; v1(79.781,-50.025) R127.1@80.939,-50.025 ; v1(79.808,-38.025) R129.1@80.939,-38.025 ; v1(79.84,-36.025) R128.1@80.939,-36.025
  Top Layer w1: C10.1@57.404,-13.703 58.302,-12.805 C9.1@60.223,-12.805 v1(62.23,-12.805) 65.944,-12.805 ; U12.2@65.965,-17.326 v1(65.965,-14.986) v1(65.965,-14.097) U12.4@65.965,-11.526
  POWER w0.5: v1(-52.426,-29.083) -41.377,-29.083 ; 20.295,-42.545 20.295,-55.855 21.946,-57.506 v1(26.822,-57.506) v1(32.563,-57.506) v1(38.049,-57.506) v1(43.79,-57.506) v1(49.2,-57.506) v1(54.915,-57.506) 56.464,-59.055 v1(77.038,-59.055)
  Bottom Layer w0.5: P9.7@58.262,-52.578 58.262,-52.075 v1(62.306,-48.031)
  other v1: 62.992,-12.827 63.754,-12.827
  other v3: -61.62,31.725
VDD5V: C22.1 C23.2 C28.1 C74.1 J1.1 J1.2 J1.3 J1.4 J15.50 J15.51 J15.52 J15.53 J15.54 P2.5 P2.6 P3.5 P3.6 P4.5 P4.6 P6.5 P6.6 P8.1 Q1.3 Q3.2 Q5.2 Q6.2 R3.2 R35.2 R59.2 R107.2 R108.2 R260.1 | length 879.5
  Top Layer w0.2: J15.54@-12.975,-44.925 -12.975,-42.803 ; J15.53@-12.475,-44.925 -12.475,-42.777 ; J15.52@-11.975,-44.925 -11.975,-42.785 ; J15.51@-11.475,-44.925 -11.475,-42.793 -11.258,-42.793 -10.975,-43.076 J15.50@-10.975,-44.925 ; P6.5@4.508,56.134 4.508,54.928 7.62,51.816 R260.1@7.62,50.94 ; Q3.2@69.342,-1.841 71.069,-1.841 R59.2@71.501,-2.273
  Top Layer w0.3: 84.95,41.503 R3.2@86.106,42.659
  Top Layer w0.5: -50.673,13.157 -50.61,13.094 C23.2@-49.149,13.094 -48.451,13.094 -48.031,12.675 -48.031,9.754 -47.447,9.169 -40.056,9.169 -38.925,10.3 ; -38.925,9.919 -38.925,10.3 ; -38.925,10.49 -38.925,10.3 ; Q6.2@-38.925,13.132 -38.925,10.3
  Top Layer w0.8: v5(-53.823,11.532) v5(-52.527,11.532) v5(-51.867,11.532) -51.308,11.532 -50.673,12.167 -50.673,13.157 -50.673,40.488 -48.082,43.078 -48.082,53.975 -42.443,59.614 10.312,59.614 11.455,58.471 40.564,58.471 42.799,56.236 v1(42.799,43.866) ; v1(42.799,37.008) 43.294,36.512 Q5.2@43.294,33.909
  Top Layer w1: C74.1@-15.342,-40.448 v3(-15.342,-42.443) -15.011,-42.774 -11.495,-42.774 -11.475,-42.793 ; Q3.2@69.342,-1.841 69.342,0.394 69.71,0.762 v1(72.644,0.762) v1(73.279,0.127) ; Q1.3@70.282,39.306 71.056,39.306 71.501,38.862 85.217,38.862 ; C22.1@80.01,45.961 C28.1@82.178,43.793
  Top Layer w2: -23.114,31.496 v3(-15.367,31.496) v3(-14.478,31.496) v3(-13.716,31.496) ; C28.1@82.178,43.793 85.966,40.005 v3(86.36,40.005) 85.217,38.862
  POWER w0.5: 86.425,-34.025 P8.1@89.164,-34.025
  POWER w1: P4.6@-89.63,-49.34 -85.407,-49.34 -84.074,-50.673 -84.074,-61.087 -80.264,-64.897 -17.399,-64.897 -14.783,-62.281 ; P2.6@-89.63,19.875 P2.5@-87.63,19.875 -85.598,19.875 ; P3.6@-89.63,38.29 -85.63,38.29 ; -15.342,-62.484 v3(-15.342,-41.402) ; 4.508,53.34 P6.5@4.508,56.134 P6.6@4.508,58.134
  POWER w1.6: -85.041,19.914 -85.041,42.899
  POWER w2: -85.041,19.914 -81.612,16.485 -59.03,16.485 -54.077,11.532 v5(-53.823,11.532) v5(-53.175,11.532) v5(-52.527,11.532) v5@-52.502,11.532 ; -85.041,42.899 -83.693,44.247 -49.936,44.247 -47.549,46.634 -47.549,51.257 -40.894,57.912 -11.176,57.912 -6.604,53.34 -4.953,53.34 ; -14.783,-62.281 79.273,-62.281 86.36,-55.194 86.36,-2.286 ; v3@-14.757,31.496 -6.985,31.496 -4.953,33.528 -4.953,53.34 ; 72.898,0.508 v1(73.279,0.127) 75.692,-2.286 86.36,-2.286 ; -4.953,53.34 4.508,53.34 12.954,53.34 18.542,58.928 54.356,58.928 56.007,57.277 81.407,57.277 86.36,52.324 v3(86.36,40.64) v3(86.36,40.005) v3(86.36,39.37) 86.36,-2.286
  Bottom Layer w0.8: v1(42.799,37.008) v1(42.799,43.866)
  other v3: -15.342,-41.923 -12.954,31.496 85.725,40.005 86.995,40.005
VDD5V_OUT: C1.2 C2.2 C6.1 C7.1 Q3.3 R35.1 U3.2 U12.1 U18.2 | length 299.8
  Top Layer w0.5: v1(-51.156,-17.272) C2.2@-51.156,-15.786 ; v1(-49.403,-26.391) -47.803,-24.79 C1.2@-46.978,-24.79
  Top Layer w1: C7.1@62.218,-5.613 63.229,-4.602 63.229,-2.781 65.27,-2.781 ; R35.1@67.678,0.508 67.31,0.14 Q3.3@67.31,-2.781 65.27,-2.781 ; v1(69.723,-18.796) 69.723,-18.783 U12.1@68.265,-17.326 69.342,-16.249 69.342,-10.16 68.199,-9.017 66.294,-9.017 65.27,-7.993 65.27,-2.781
  Bottom Layer w0.6: U18.2@-62.484,-34.798 -59.563,-37.719 -49.378,-37.719 ; U3.2@-62.484,-14.732 -59.944,-17.272 v1(-51.156,-17.272) -51.029,-17.272 -49.378,-18.923 -49.378,-37.719 ; v1(69.723,-18.796) 71.171,-20.244 83.617,-20.244 87.02,-23.647 87.02,-54.915 80.848,-61.087 73.152,-61.087 69.698,-64.541 -47.422,-64.541 -49.378,-62.586 -49.378,-37.719
VDDIO: C46.2 R87.1 U8.29 | length 27.1
  Top Layer w0.2: 42.189,17.374 42.443,17.374 42.866,17.796 U8.29@45.133,17.796
  Top Layer w0.6: C46.2@39.652,17.383 41.266,17.383 v3(41.275,17.374) 42.189,17.374 ; R87.1@52.959,26.505 52.959,28.016
  Bottom Layer w0.6: v3(40.665,17.374) v3(41.275,17.374) 42.24,17.374 43.79,18.923 43.79,23.114 46.406,25.73 52.07,25.73 52.959,26.619 52.959,28.016
  other v3: 52.959,27.457
VRTC: C3.1 D3.3 U1.8 | length 4.7
  Top Layer w0.3: C3.1@-40.056,0.432 -40.056,-0.806 D3.3@-39.236,-1.626 U1.8@-36.885,-1.626
pads on no net: BT1.3 BT1.4 D8.2 J1.0 J1.14 J1.41 J1.49 J1.51 J1.66 J1.87 J1.89 J1.93 J1.95 J1.97 J2.0 J4.3@-23.493,-61.671 J4.3@-47.623,-61.671 J5. J9.2 J9.M1 J9.M2 J10.1 J10.4 J10.6 J10.7 J10.8 J10.9 J11.1 J11.4 J11.6 J11.7 J11.8 J11.9 J12.1 J12.4 J13.1 J13.4 J14.1 J14.4 K2.1 K2.4 K3.1 K3.4 K4.1 K4.4 K5.1 K5.4 K6.1 K6.4 K7.1 K7.4 K8.1 K8.4 MARK1.0 MARK2.0 MARK3.0 MARK4.0 P1.6 P1.15 P1.17 P1.18 P1.19 P4.10 P6.1 P6.2 P8.4 P8.6 P8.8 P8.10 P8.11 P8.12 P8.14 P8.16 P8.18 P8.20 R60.1 R60.8 S1. S1.1 U6.12 U6.13 U6.16 U6.17 U6.18 U6.19 U6.20 U6.21 U8.5 U8.22 U8.25 U8.26 U8.41 U8.42 U8.43 U8.45 U8.46 U11.9 U11.10 U11.11 U11.12 U11.14 U11.19 U11.22 U11.27 U11.28 U11.29 U11.30 U11.31 U11.32 U11.34 U11.35 U11.47 U11.48 U14.5 X4.1

## Keep-outs
Keep-Out Layer:
  lines w0.2: -94.725,-62.525 ccw(c-89.725,-62.525) -89.725,-67.525 90.275,-67.525 ccw(c90.275,-62.525) 95.275,-62.525 95.275,57.475 ccw(c90.275,57.475) 90.275,62.475 3.375,62.475 -89.725,62.475 ccw(c-89.725,57.475) -94.725,57.475 -94.725,-62.525

## Other copper
Top Layer:
  pour cut-out: -71.928,25.379 -71.928,32.329 -64.978,32.329 -64.978,25.379
  pour cut-out: -42.617,30.759 -42.617,24.659 -36.517,24.659 -36.517,30.759
  pour cut-out: 45.302,20.154 51.177,20.154 51.177,14.254 45.302,14.254
  pour cut-out: -65.024,6.604 -53.34,-5.08 -53.34,-39.116 -61.468,-47.244 -82.804,-47.244 -86.36,-43.688 -97.536,-43.688 -97.536,6.604
GND:
  pour cut-out: -65.024,6.604 -53.34,-5.08 -53.34,-39.116 -61.468,-47.244 -82.804,-47.244 -86.36,-43.688 -97.536,-43.688 -97.536,6.604
POWER:
  rectangle net VDD5V: 85.471,38.989 87.122,40.996
  pour cut-out: -65.024,6.604 -53.34,-5.08 -53.34,-39.116 -61.468,-47.244 -82.804,-47.244 -86.36,-43.688 -97.536,-43.688 -97.536,6.604
Bottom Layer:
  rectangle net GND: 1.307,53.061 1.688,57.198
  pour cut-out: -65.024,6.604 -53.34,-5.08 -53.34,-39.116 -61.468,-47.244 -82.804,-47.244 -86.36,-43.688 -97.536,-43.688 -97.536,6.604

## Silkscreen, mask and mechanical layers (free items; w line width, h text height)
Top Overlay:
  lines w0.1: -23.975,-32 ccw(c-21.975,-32) -21.975,-34 20.025,-34 ccw(c20.025,-32) 22.025,-32 22.025,-30.925 ; -23.975,32.8 -23.975,34 cw(c-21.975,34) -21.975,36 20.025,36 ; 20.035,35.99 22.025,34 22.025,32.7
  lines w0.254: -74.422,19.304 -73.66,18.542 -62.992,18.542 -62.484,18.034 -62.484,6.604 ; -62.484,6.604 -74.676,6.604 -74.676,4.318 -73.66,3.302 -62.484,3.302 -61.722,4.064 -61.722,5.842 -62.484,6.604
  text "OTG" at 39.878,53.34 h2.5
  text "USB1" at -15.24,53.086 h2.5 r90
  text "USB2" at -24.892,52.832 h2.5 r90
  text "USB3" at -34.544,52.578 h2.5 r90
  text "USB4" at -44.45,52.324 h2.5 r90
  text "PWR" at 84.836,51.816 h2.5
  text "UART4" at -4.064,50.038 h2.5
  text "MIC" at -58.42,49.784 h2.5 r90
  text "LINE IN" at -70.739,48.133 h2.5 r90
  text "PHONE" at -83.185,47.752 h2.5 r90
  text "POWER" at 54.229,46.228 h1.6
  text "DC5V" at 54.102,44.958 h1.6
  text "I2C" at -85.344,43.307 h2.5 r270
  text "5V" at 81.407,40.513 h2.5
  text "NET" at 27.686,38.608 h2.5
  text "DEBUG" at 75.489,21.184 h2.5 r90
  text "COM0" at 75.616,13.691 h2.5 r90
  text "SPI" at -85.344,12.7 h2.5 r270
  text "USB 5V" at -56.642,2.794 h2.5
  text "A" at -84.785,-2.311 h2.5 r270
  text "COM1" at 75.438,-5.842 h2.5 r90
  text "485" at -93.218,-14.605 h2.5 r270
  text "B" at -84.912,-14.986 h2.5 r270
  text "L" at -84.76,-20.879 h2.5 r270
  text "3.3V" at 64.008,-25.146 h2.5
  text "H" at -84.836,-33.096 h2.5 r270
  text "CAN" at -93.193,-33.122 h2.5 r270
  text "LCD" at -1.475,-41.525 h2.5
  text "BOOT" at 65.424,-43.688 h1.3
  text "OFF-NAND" at 65.424,-45.212 h1
  text "AD" at -84.582,-45.974 h2.5 r270
  text "ON-TF Card" at 65.424,-46.736 h1
  text "SDIO_WIFI" at 86.489,-49.975 h2.5 r90
  text "SD card" at -58.674,-54.864 h2.5
  text "JTAG" at -72.39,-58.166 h2.5
  text "BOOT" at 67.564,-66.548 h1.5
  text "RST" at 79.959,-66.751 h2.5

## Text inside footprints (layer, text, board x,y; h text height)
J9: Top Overlay "10" at 24.415,41.457 h2 r90; Top Overlay "1" at 36.565,41.332 h2 r90